# Altium PCB CubeSatBoardTemplatev2.2.PcbDoc
Units mil, origin at the board's own origin, x right, y up, seen from the top; angles counter-clockwise.
Board outline 3625 x 3400 mil, 2 copper layers (Component Side, Bottom Layer), stack 65.756 mil thick; 2 components, 1 nets, 104 pads, 28 vias.
Unrouted connection lines stored in the file: 4.
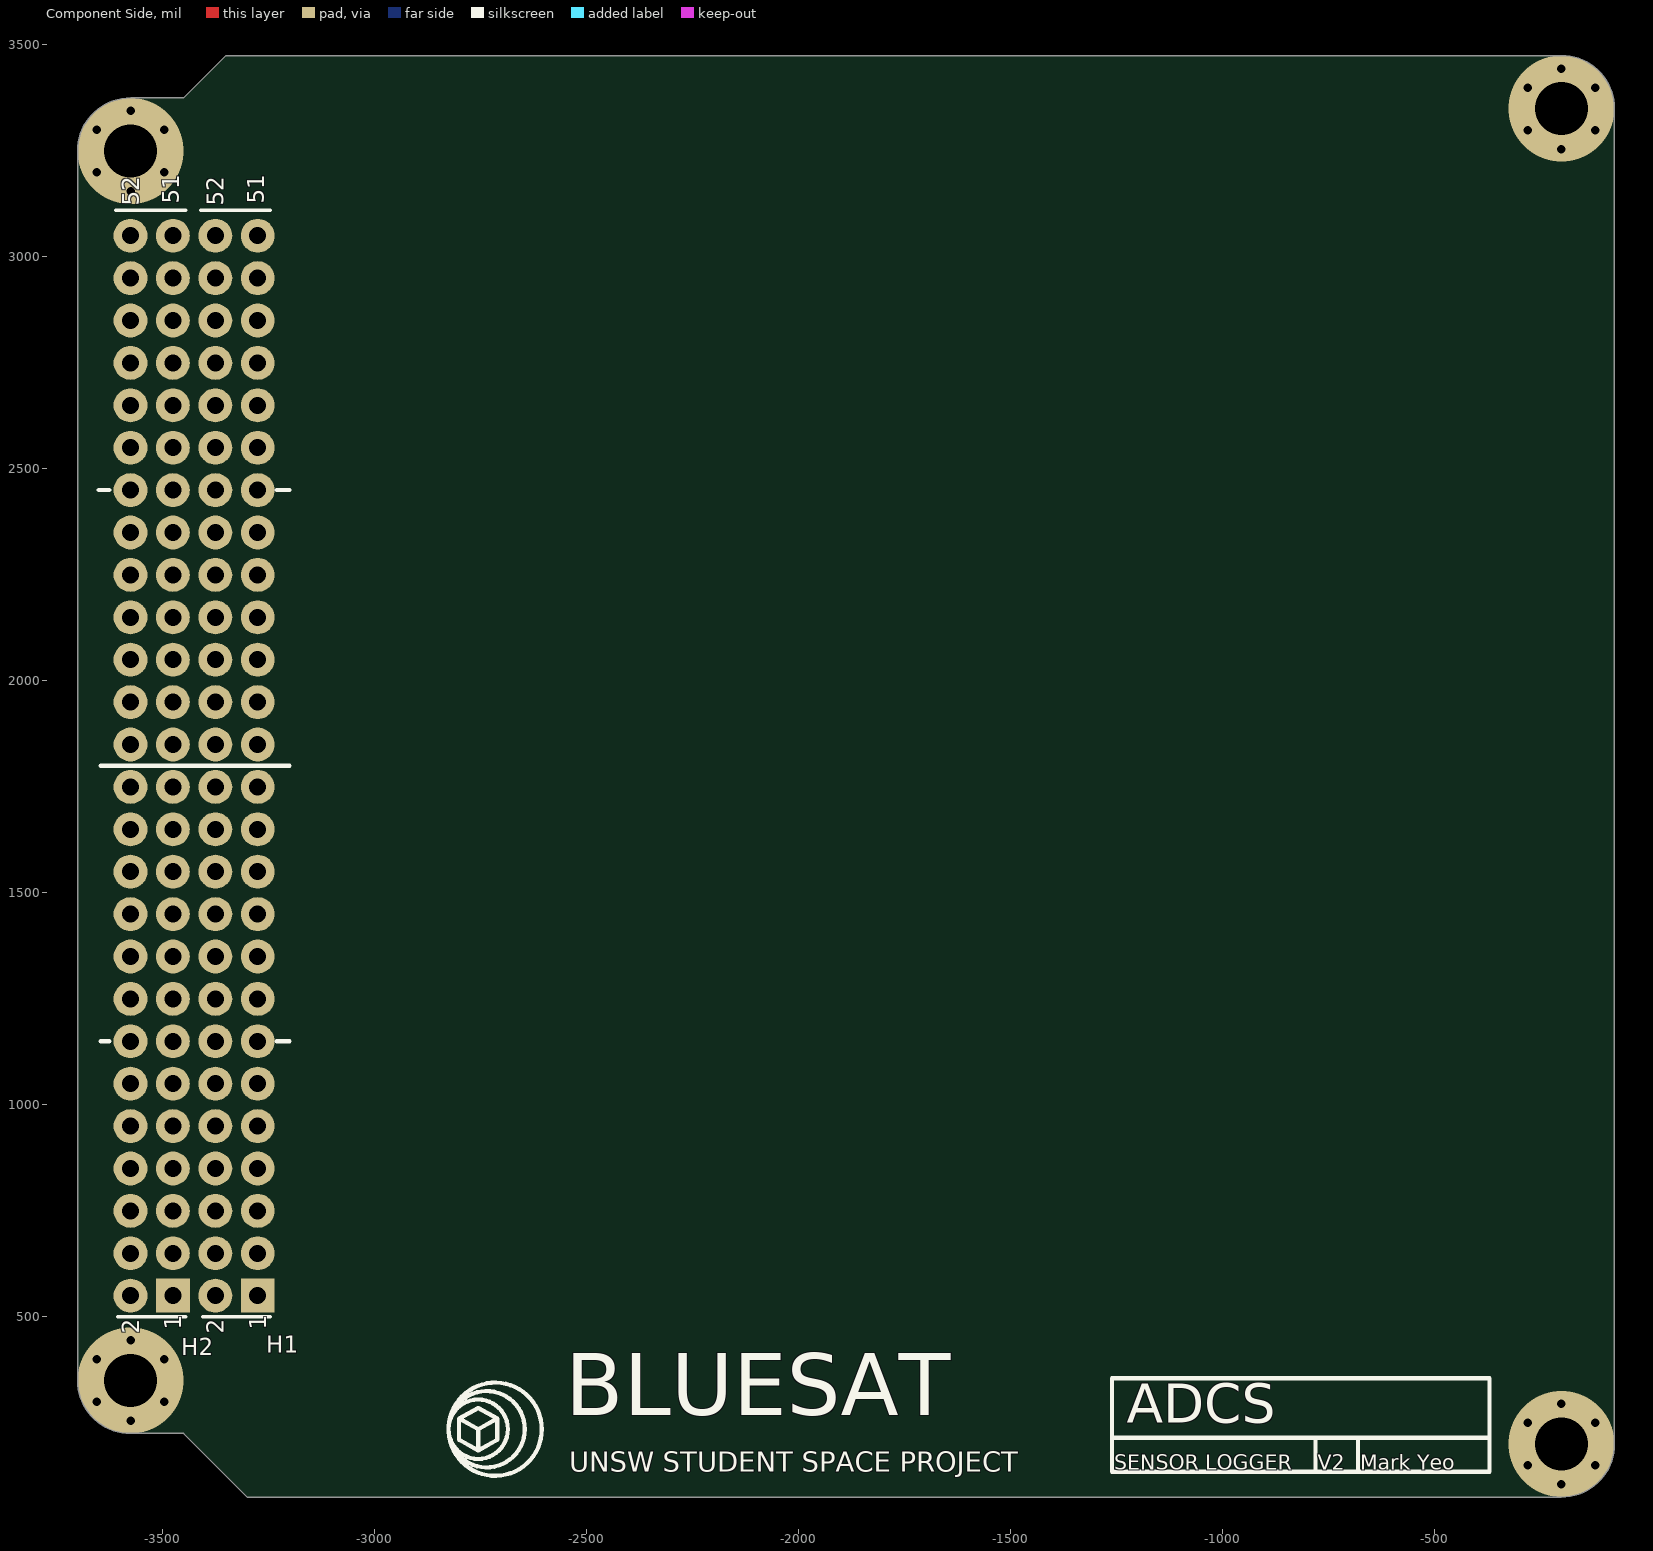
[diagram p0: Component Side view]
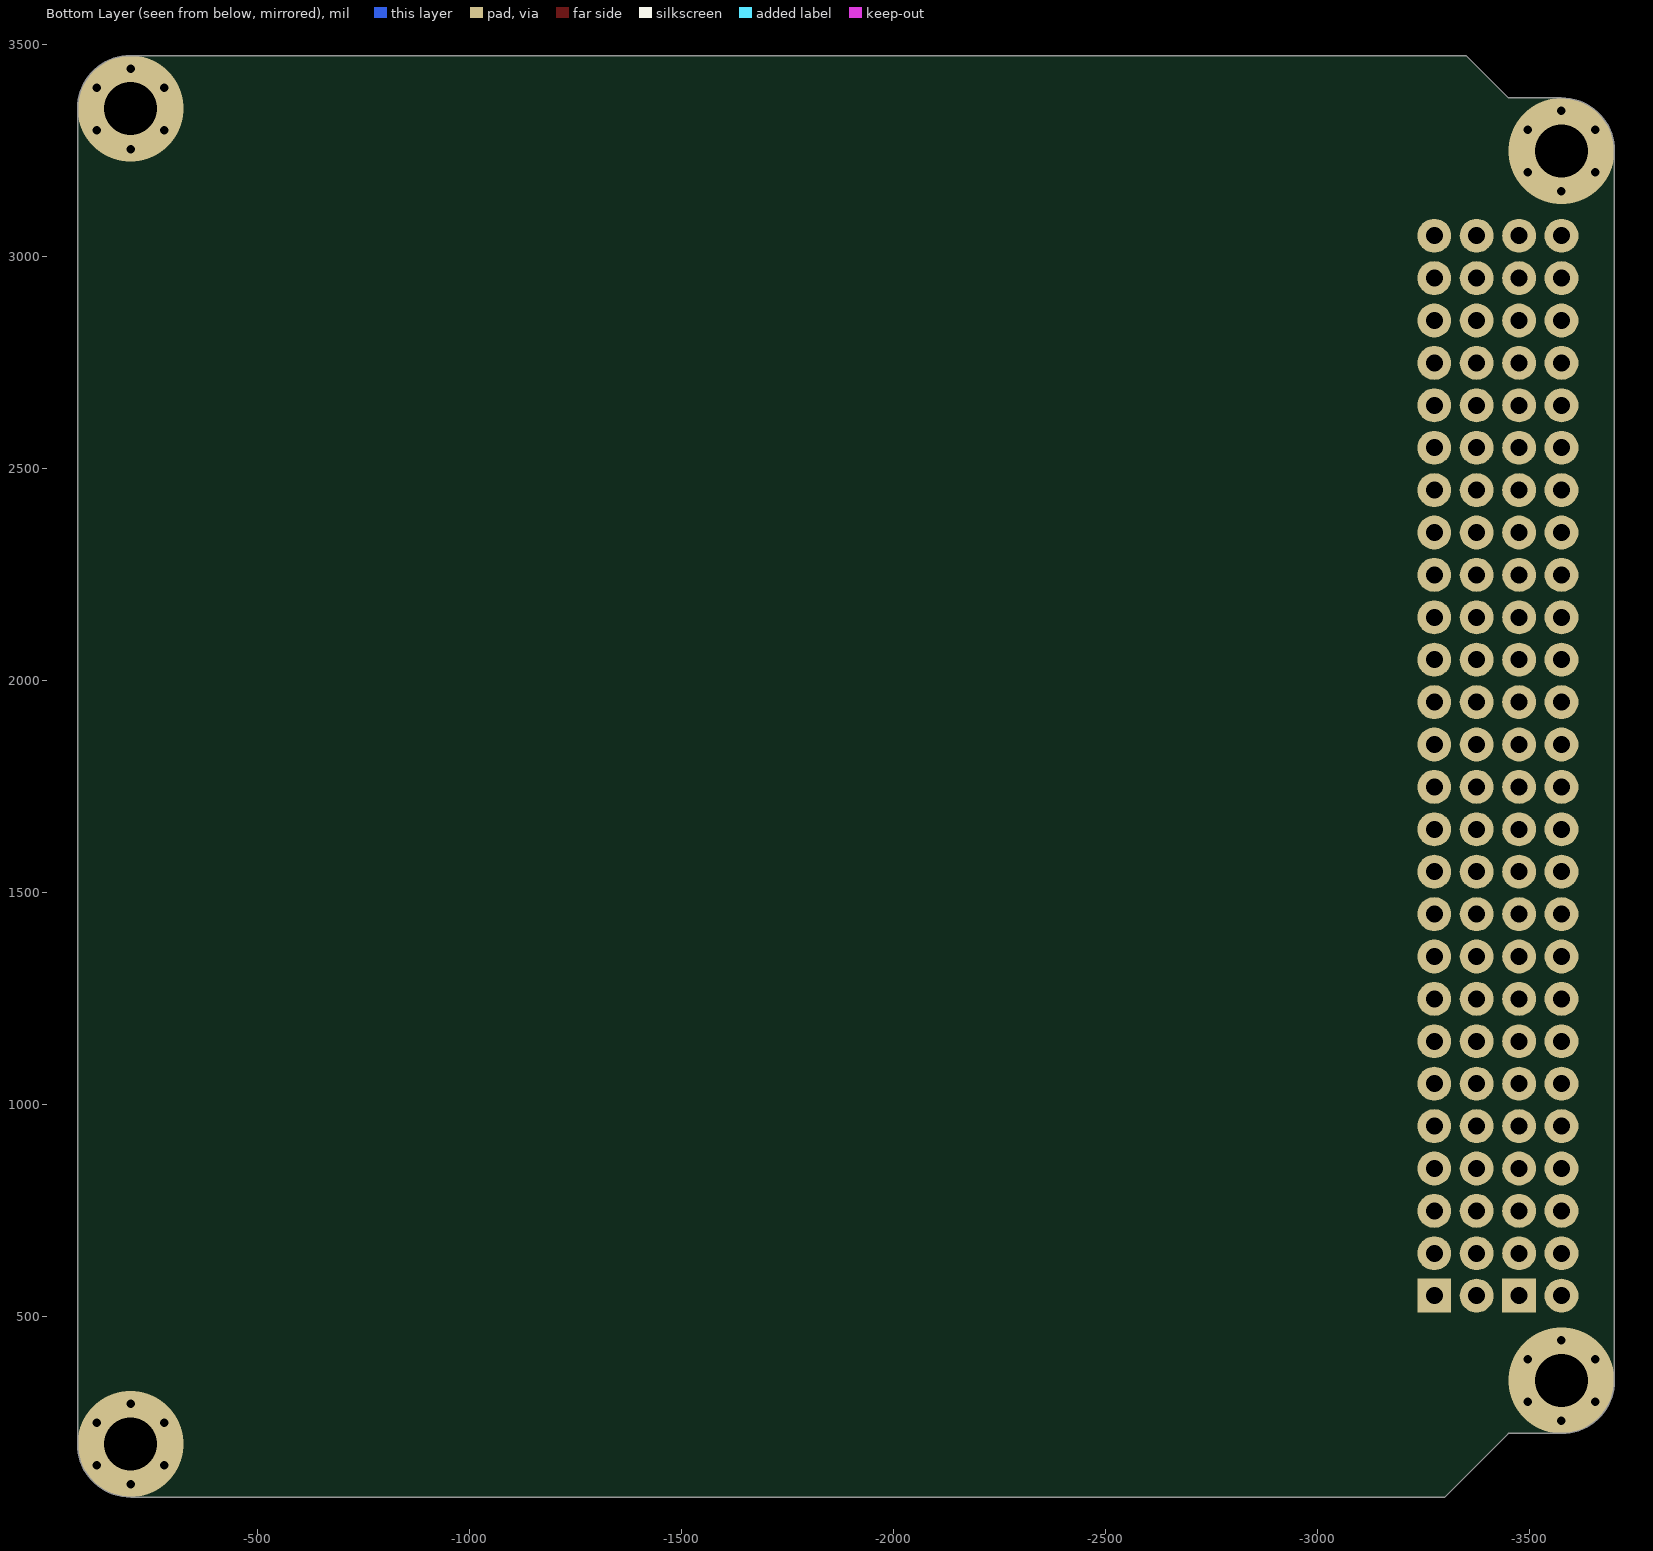
[diagram p1: Bottom Layer view, seen from below]

## Layer stack, top to bottom
Top Solder: solder mask 0.394, Solder Resist, Dk 3.5
Component Side: signal copper 1.378
Dielectric 1: core 63, FR-4, Dk 4.2
Bottom Layer: signal copper 1.378
Solder Side: solder mask 0.394, Solder Resist, Dk 3.5

## Board outline
-3575,225 cw(c-3575,350) -3700,350 -3700,3250 cw(c-3575,3250) -3575,3375 -3450,3375 -3350,3475 -200,3475 cw(c-200,3350) -75,3350 -75,200 cw(c-200,200) -200,75 -3300,75 -3450,225

## Design rules (kind name [scope] priority, off if disabled: settings)
Clearance [All] p1: gap=10
Clearance "Clearance (Same Net)" [All] p2: gap=0 except(8: SMDPad-SMDPad SMDPad-THPad SMDPad-Via)
ComponentClearance [All] p1: gap=0 collisioncheckmode=3 verticalgap=0 showdistances=FALSE
HoleSize HoleSize_1 [All] p1: absolutevalues=TRUE maxlimit=100000 minlimit=24 maxpercent=80.000 minpercent=20.000
HoleSize [All] p2: absolutevalues=TRUE maxlimit=100 minlimit=1 maxpercent=80.000 minpercent=20.000
HoleToHoleClearance mdViaViaSameLayer [All] p1: gap=8 allowstackedmicrovias=TRUE
HoleToHoleClearance [All] p2: gap=10 allowstackedmicrovias=TRUE
PasteMaskExpansion mlMinCreamFrame [All] p1: expansion=0
PasteMaskExpansion [All] p2: expansion=0
PolygonConnect ThermalVias [IsVia] p1: connectstyle=Direct reliefconductorwidth=10 reliefentries=4 polygonreliefangle="90 Angle" airgapwidth=10
PolygonConnect [All] p2: connectstyle=Relief reliefconductorwidth=10 reliefentries=4 polygonreliefangle="90 Angle" airgapwidth=10
RoutingVias [All] p1: holewidth=28 width=50 viastyle="Through Hole" minholewidth=28 minwidth=50 maxholewidth=28 maxwidth=50
SilkToSilkClearance [All] p1 off: silktosilkclearance=10
SilkToSolderMaskClearance [IsPad] p1 off: minsilkscreentomaskgap=10 clearancetoexposedcopper=TRUE
SolderMaskExpansion mlMinStopFrame [All] p1: expansion=4
SolderMaskExpansion [All] p2: expansion=4
Width Width_1 [All] p1: maxlimit=100000 minlimit=6 preferedwidth=10
Width [All] p2: maxlimit=10 minlimit=8 preferedwidth=10
24 further rules are at their usual default settings.

## Components (designator, comment, footprint, x,y, rotation, side; value= is the part's Value field where it differs from the comment)
H1 "26X2 Header" "26X2 Header" -3275,550 r90 top
H2 "26X2 Header" "26X2 Header" -3475,550 r90 top

## Footprints (in the part's own frame and the unit in brackets; to place one, negate y for a bottom-side part, rotate by r counter-clockwise, add the part's x,y. Pads: shape width x height; smd on the part's side, far side on the other; paste and mask are expansions set on the pad)
"26X2 Header" [mil]
  rect 80x80 hole 40: 1(0,0)
  round 80 hole 40: 2(0,100) 3(100,0) 4(100,100) 5(200,0) 6(200,100) 7(300,0) 8(300,100) 9(400,0) 10(400,100) 11(500,0) 12(500,100) 13(600,0) 14(600,100) 15(700,0) 16(700,100) 17(800,0) 18(800,100) 19(900,0) 20(900,100) 21(1000,0) 22(1000,100) 23(1100,0) 24(1100,100) 25(1200,0) 26(1200,100) 27(1300,0) 28(1300,100) 29(1400,0) 30(1400,100) 31(1500,0) 32(1500,100) 33(1600,0) 34(1600,100) 35(1700,0) 36(1700,100) 37(1800,0) 38(1800,100) 39(1900,0) 40(1900,100) 41(2000,0) 42(2000,100) 43(2100,0) 44(2100,100) 45(2200,0) 46(2200,100) 47(2300,0) 48(2300,100) 49(2400,0) 50(2400,100) 51(2500,0) 52(2500,100)
  silkscreen extent -50,-30 2560,135, body extent -55,-47 2555,150, height 335

## Via types
v1: diameter 40, hole 20, Component Side to Bottom Layer, 24 vias
v2: diameter 250, hole 125, Component Side to Bottom Layer, 4 vias

## Nets (pads, with @x,y where several pads share a name; then routed paths per layer and width w, separated by ;. In a path a pad name is that pad's centre, name@x,y a point inside that pad or via, vN(x,y) a via of type N, cw(c..) or ccw(c..) an arc to the next point about the centre after c; other vN are vias at no path point)
GND: H2.29
  other v1: -200,105 -280,150 -120,150 -280,250 -120,250 -3575,255 -200,295 -3655,300 -3495,300 -3655,400 -3495,400 -3575,445 -3575,3155 -3655,3200 -3495,3200 -200,3254 -280,3299 -120,3299 -3655,3300 -3495,3300 -3575,3345 -280,3399 -120,3399 -200,3444
  other v2: -200,200 -3575,350 -3575,3250 -200,3350
pads on no net: H1.1 H1.2 H1.3 H1.4 H1.5 H1.6 H1.7 H1.8 H1.9 H1.10 H1.11 H1.12 H1.13 H1.14 H1.15 H1.16 H1.17 H1.18 H1.19 H1.20 H1.21 H1.22 H1.23 H1.24 H1.25 H1.26 H1.27 H1.28 H1.29 H1.30 H1.31 H1.32 H1.33 H1.34 H1.35 H1.36 H1.37 H1.38 H1.39 H1.40 H1.41 H1.42 H1.43 H1.44 H1.45 H1.46 H1.47 H1.48 H1.49 H1.50 H1.51 H1.52 H2.1 H2.2 H2.3 H2.4 H2.5 H2.6 H2.7 H2.8 H2.9 H2.10 H2.11 H2.12 H2.13 H2.14 H2.15 H2.16 H2.17 H2.18 H2.19 H2.20 H2.21 H2.22 H2.23 H2.24 H2.25 H2.26 H2.27 H2.28 H2.30 H2.31 H2.32 H2.33 H2.34 H2.35 H2.36 H2.37 H2.38 H2.39 H2.40 H2.41 H2.42 H2.43 H2.44 H2.45 H2.46 H2.47 H2.48 H2.49 H2.50 H2.51 H2.52

## Silkscreen, mask and mechanical layers (free items; w line width, h text height)
Top Overlay:
  circle w10: c-2715,235 r110
  circle w10: c-2735,235 r90
  circle w10: c-2755,235 r70
  lines w10: -3650,2450 -3625,2450 ; -3645,1150 -3625,1150 ; -3645,1800 -3200,1800 ; -3230,1150 -3200,1150 ; -3230,2450 -3200,2450 ; -1260,215 -370,215 ; -780,135 -780,215 ; -680,135 -680,215 ; -2800,260 -2755,285 -2710,260 ; -2800,260 -2800,210 -2755,185 ; -2800,260 -2755,235 ; -2755,185 -2710,210 -2710,260 ; -2755,185 -2755,235 ; -2755,235 -2710,260 ; -1260,135 -370,135 -370,355 -1260,355 -1260,135
  text "BLUESAT" at -2550,220 h250
  text "ADCS" at -1225,220 h157.48
  text "SENSOR LOGGER" at -1255,140 h35
  text "V2" at -775,140 h35
  text "Mark Yeo" at -675,140 h35
  text "UNSW STUDENT SPACE PROJECT" at -2540,135 h47.24
Mechanical 13:
  lines w10: -3700,350 ccw(c-3575,350) -3575,225 -3500,225 -3450,225 -3300,75 -200,75 ccw(c-200,200) -75,200 -75,3350 ccw(c-200,3350) -200,3475 -3350,3475 -3450,3375 -3500,3375 -3575,3375 ccw(c-3575,3250) -3700,3250 -3700,350

## Text inside footprints (layer, text, board x,y; h text height)
H1: Top Overlay "52" at -3355,3120.16 h40 r90; Top Overlay "51" at -3260,3125.16 h40 r90; Top Overlay "1" at -3255,470.16 h40 r90; Top Overlay "2" at -3355,460.16 h40 r90
H2: Top Overlay "52" at -3555,3120.16 h40 r90; Top Overlay "51" at -3460,3125.16 h40 r90; Top Overlay "1" at -3455,470.16 h40 r90; Top Overlay "2" at -3555,460.16 h40 r90